# EAGLE board Wave Fold Osc PANEL V1 (EAGLE 7.7.0)
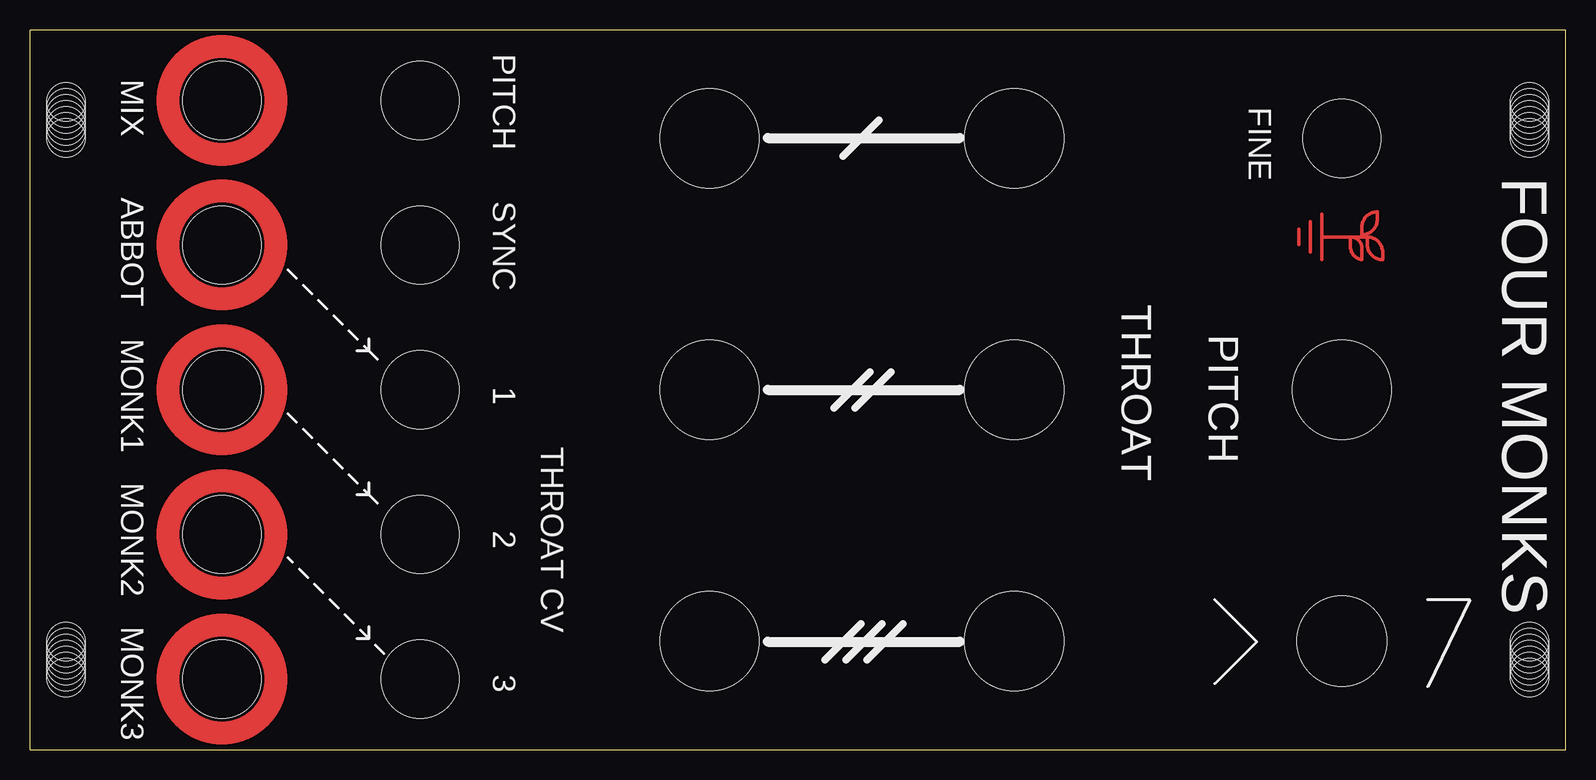
[diagram p0: board, top side]
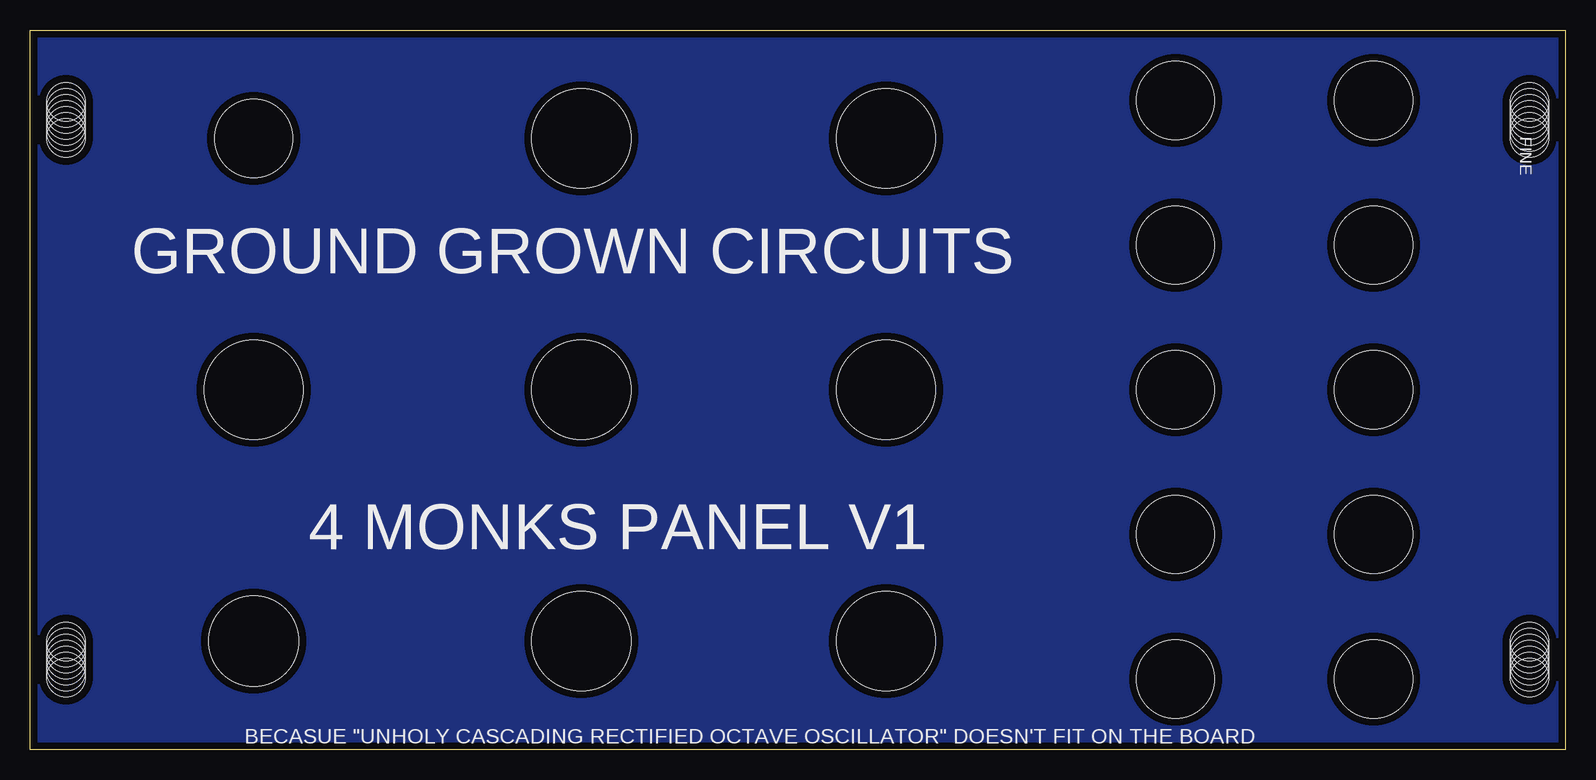
[diagram p1: board, bottom side, seen from below]

Size 128 x 60 mm. Coordinates in mm from the lower left corner, seen from the top.
Outline: 0,0 0,60 128,60 128,0 0,0
Copper layers (1*16): Top 0.035mm / dielectric 1.5mm / Bottom 0.035mm
Design rules "SparkFun": minimum track width 8mil, minimum drill 20mil, track to track 8mil, track to pad 8mil, pad to pad 8mil, via to via 8mil, smd to smd 8mil, copper to edge 8mil, drill to drill 8mil, minimum pad ring 12mil, minimum via ring 10mil, stop-mask expansion 4mil, vias tented up to drill 20mil, thermal gap 10mil

## Footprints (pad centres in the part's own frame; a part is rotated, then mirrored left to right if it is on the bottom)
JACK_DRILL = hole 6.5: 0,0
POT_DRILL = hole 8.25: 0,0
MOUNT_DRILL = hole 3.2: 3,9; 3,8.5; 3,8; 3,7.5; 3,7; 3,6.5; 3,6
JACK_DRILL_COPPER = hole 6.5: 0,0
SWITCH_DRILL = hole 7.5: 0,0

## Placement (x,y rotation side)
1V/O  [JACK_DRILL]  32.52,54.13 90 top
AMT1  100K  [POT_DRILL]  56.65,50.96 180 top
AMT2  100K  [POT_DRILL]  56.65,30 180 top
AMT3  100K  [POT_DRILL]  56.65,9.05 180 top
COR  100K  [POT_DRILL]  109.35,30 180 top
CV1  [JACK_DRILL]  32.52,30 90 top
CV2  [JACK_DRILL]  32.52,17.94 90 top
CV3  [JACK_DRILL]  32.52,5.87 90 top
E$1  [LOGO_SMALL_COPPER]  107.75,42.75 270 top
E$20  [MOUNT_DRILL]  0,0 0 top
E$21  [MOUNT_DRILL]  0,60 180 bottom
E$22  [MOUNT_DRILL]  128,60 180 top
E$23  [MOUNT_DRILL]  128,0 0 bottom
FIN  100K  [JACK_DRILL]  109.35,50.96 180 top
FOLD1  [JACK_DRILL_COPPER]  16,30 90 top
FOLD2  [JACK_DRILL_COPPER]  16,17.94 90 top
FOLD3  [JACK_DRILL_COPPER]  16,5.87 90 top
MIX  [JACK_DRILL_COPPER]  16,54.13 90 top
OFF1  100K  [POT_DRILL]  82.05,50.96 180 top
OFF2  100K  [POT_DRILL]  82.05,30 180 top
OFF3  100K  [POT_DRILL]  82.05,9.05 180 top
S1  [SWITCH_DRILL]  109.35,9.05 270 top
SYNC  [JACK_DRILL]  32.52,42.07 90 top
WAVE  [JACK_DRILL_COPPER]  16,42.07 90 top

## Library data of the parts
1V/O CV1-CV3 E$1 E$20-E$23 FOLD1-FOLD3 MIX S1 SYNC WAVE = GroundGrownCircuits
AMT1-AMT3 COR FIN OFF1-OFF3 = GroundGrownCircuits; PROD_ID: RES-09177

## Tracks (layer width: path | path; a pad name or v marks a point on that pad's centre or on a via)
S$1
  pour Bottom (isolate 0.61): 0,0 0,60 128,60 128,0

## Text on the board
tPlace: MIX | PITCH | FINE | ABBOT | SYNC | MONK1 | 1 | THROAT | FOUR MONKS | PITCH | MONK2 | 2 | THROAT CV | MONK3 | 3
bPlace: FINE | GROUND GROWN CIRCUITS | 4 MONKS PANEL V1 | BECASUE "UNHOLY CASCADING RECTIFIED OCTAVE OSCILLATOR" DOESN'T FIT ON THE BOARD